# EAGLE board o (EAGLE 7.1.0)
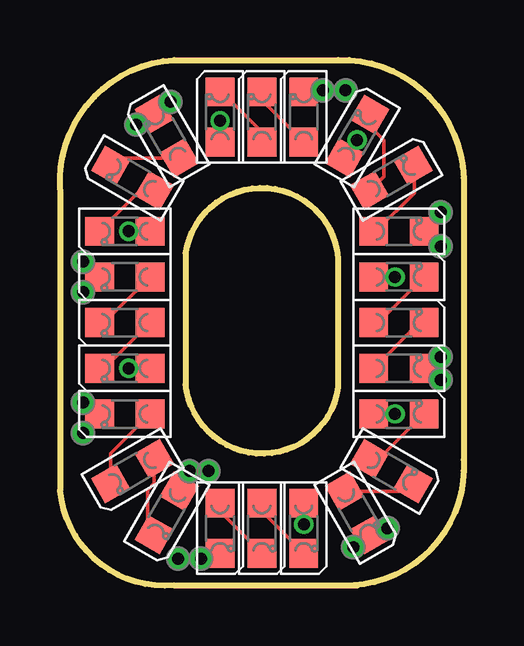
[diagram p0: board, top side]
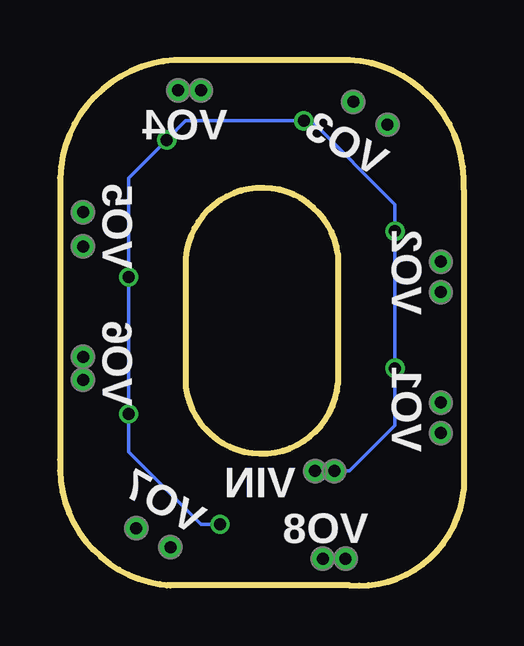
[diagram p1: board, bottom side, seen from below]

Size 16.84 x 21.93 mm. Coordinates in mm from the lower left corner, seen from the top.
Outline: 12.23,0.02 arc90 16.84,5.26 16.84,17 arc90 11.6,21.93 4.77,21.93 arc90 0.01,16.53 0.01,3.99 arc90 4.77,0.02 12.39,0.02
Outline: 5.25,13.83 arc-167 11.6,13.67 11.6,8.27 arc-167 5.25,8.43 5.25,13.83
Copper layers (1*16): Top 0.035mm / dielectric 1.5mm / Bottom 0.035mm
Design rules "Fusion_eagle_rule_v1.1_tms *": minimum track width 6mil, minimum drill 12mil, track to track 6mil, track to pad 6mil, pad to pad 6mil, via to via 6mil, smd to smd 0mil, copper to edge 10mil, drill to drill 10mil, minimum pad ring 10mil, minimum via ring 6mil, stop-mask expansion 2mil, vias tented up to drill 100mil, thermal gap 10mil

## Footprints (pad centres in the part's own frame; a part is rotated, then mirrored left to right if it is on the bottom)
LED_0805 = smd 1.2 x 1.2: A 0,-1.05; C 0,1.05
P1-20 = drill 0.5: TP 0,0

## Placement (x,y rotation side)
LED1  [LED_0805]  4.45,3.03 150 top
LED2  [LED_0805]  3.02,4.78 120 top
LED3  [LED_0805]  2.71,7.16 90 top
LED4  [LED_0805]  2.71,9.07 90 top
LED5  [LED_0805]  2.71,10.97 90 top
LED6  [LED_0805]  2.71,12.88 90 top
LED7  [LED_0805]  2.71,14.78 90 top
LED8  [LED_0805]  3.02,17 60 top
LED9  [LED_0805]  4.45,18.75 30 top
LED10  [LED_0805]  6.68,19.54 0 top
LED11  [LED_0805]  8.42,19.54 0 top
LED12  [LED_0805]  10.17,19.54 0 top
LED13  [LED_0805]  12.39,18.75 330 top
LED14  [LED_0805]  13.82,17 300 top
LED15  [LED_0805]  14.14,14.78 270 top
LED16  [LED_0805]  14.14,12.88 270 top
LED17  [LED_0805]  14.14,10.97 270 top
LED18  [LED_0805]  14.14,9.07 270 top
LED19  [LED_0805]  14.14,7.16 270 top
LED20  [LED_0805]  13.82,4.78 240 top
LED21  [LED_0805]  12.39,3.03 210 top
LED22  [LED_0805]  10.17,2.4 180 top
LED23  [LED_0805]  8.42,2.4 180 top
LED24  [LED_0805]  6.68,2.4 180 top
VIN  [P1-20]  5.41,4.78 0 top
VIN1  [P1-20]  6.2,4.78 0 top
VO1  [P1-20]  0.96,7.64 0 top
VO2  [P1-20]  0.96,12.24 0 top
VO3  [P1-20]  3.18,19.23 0 top
VO4  [P1-20]  11.91,20.66 0 top
VO5  [P1-20]  15.88,15.58 0 top
VO6  [P1-20]  15.88,8.59 0 top
VO7  [P1-20]  13.66,2.4 0 top
VO8  [P1-20]  5.88,1.13 0 top
VO9  [P1-20]  0.96,6.37 0 top
VO10  [P1-20]  0.96,13.51 0 top
VO11  [P1-20]  4.61,20.18 0 top
VO12  [P1-20]  10.96,20.66 0 top
VO13  [P1-20]  15.88,14.15 0 top
VO14  [P1-20]  15.88,9.54 0 top
VO15  [P1-20]  12.23,1.61 0 top
VO16  [P1-20]  4.93,1.13 0 top

## Library data of the parts
LED1-LED24 VIN VIN1 VO1-VO16 = CyberRailGuru

## Nets
N$1: LED22.C LED23.A
N$2: LED23.C LED24.A
N$3: LED2.C LED3.A
N$4: LED1.C LED2.A
N$5: LED24.C VO8.TP VO16.TP
N$7: LED5.C LED6.A
N$8: LED4.C LED5.A
N$11: LED8.C LED9.A
N$12: LED7.C LED8.A
N$15: LED11.C LED12.A
N$16: LED10.C LED11.A
N$19: LED14.C LED15.A
N$20: LED13.C LED14.A
N$23: LED17.C LED18.A
N$24: LED16.C LED17.A
N$27: LED20.C LED21.A
N$28: LED19.C LED20.A
VIN: LED1.A LED4.A LED7.A LED10.A LED13.A LED16.A LED19.A LED22.A VIN1.TP VIN.TP
VOUT1: LED3.C VO1.TP VO9.TP
VOUT2: LED6.C VO2.TP VO10.TP
VOUT3: LED9.C VO3.TP VO11.TP
VOUT4: LED12.C VO4.TP VO12.TP
VOUT5: LED15.C VO5.TP VO13.TP
VOUT6: LED18.C VO6.TP VO14.TP
VOUT7: LED21.C VO7.TP VO15.TP

## Tracks (layer width: path | path; a pad name or v marks a point on that pad's centre or on a via)
N$1
  Top 0.152: LED23.A 8.42,3.1 LED22.C
N$2
  Top 0.152: LED24.A 6.68,3.1 LED23.C
N$3
  Top 0.152: LED2.C 2.11,5.52 LED3.A
N$4
  Top 0.152: LED2.A 3.93,4.26 3.66,3.99 3.66,2.39 LED1.C
N$5
  Top 0.152: LED24.C 6.1,1.35 VO8.TP VO16.TP
N$7
  Top 0.152: LED5.C 1.85,10.97 LED6.A
N$8
  Top 0.152: LED4.C 1.85,9.07 LED5.A
N$11
  Top 0.152: LED9.A 2.43,17.84 LED8.C
N$12
  Top 0.152: LED8.A 3.35,16.48 LED7.C
N$15
  Top 0.152: LED11.C 8.42,20.24 LED12.A
N$16
  Top 0.152: LED10.C 6.68,20.24 7.09,20.24 8.42,18.91 LED11.A
N$19
  Top 0.152: LED15.A 13.18,14.78 14.77,16.37 14.77,17.49 LED14.C
N$20
  Top 0.152: LED13.C 12.92,19.18 13.5,18.59 13.5,17.07 LED14.A
N$23
  Top 0.152: LED17.C 14.99,10.97 LED18.A
N$24
  Top 0.152: LED17.A 13.28,10.97 LED16.C
N$27
  Top 0.152: LED21.A 14.42,3.94 LED20.C
N$28
  Top 0.152: LED20.A 13.33,5.31 LED19.C
VIN  (via drill 0.5)
  Top 0.152: LED1.A 5.41,4.37 VIN.TP VIN1.TP | v2.87,9.07 LED4.A | LED7.A v2.87,14.78 | LED10.A v6.68,19.39 | LED13.A 11.87,18.07 v12.39,18.59 | LED16.A v13.98,12.88 | LED19.A v13.98,7.16 | LED22.A v10.17,2.56
  Bottom 0.152: VIN.TP 4.77,4.78 2.87,6.69 v2.87,9.07 v2.87,14.78 2.87,15.89 6.36,19.39 v6.68,19.39 11.6,19.39 v12.39,18.59 13.98,17 v13.98,12.88 v13.98,7.16 13.98,5.57 10.96,2.56 v10.17,2.56
VOUT1
  Top 0.152: VO1.TP 1.18,7.64 LED3.C 0.96,6.47 VO9.TP
VOUT2
  Top 0.152: VO10.TP 1.02,13.51 LED6.C 1.02,12.24 VO2.TP
VOUT3
  Top 0.152: VO11.TP 4.45,20.18 LED9.C 3.49,19.23 VO3.TP
VOUT4
  Top 0.152: LED12.C 10.23,20.66 VO12.TP VO4.TP
VOUT5
  Top 0.152: VO13.TP 15.82,14.15 LED15.C 15.88,15.48 VO5.TP
VOUT6
  Top 0.152: VO6.TP 15.66,8.59 LED18.C 15.66,9.54 VO14.TP
VOUT7
  Top 0.152: VO15.TP 12.4,1.61 LED21.C 13.19,2.4 VO7.TP

## Text on the board
201bmp: O